# Altium PCB PCB1.PcbDoc
Units mil, origin at the board's own origin, x right, y up, seen from the top; angles counter-clockwise.
Board outline 1746.25 x 841.72 mil, 2 copper layers (Top Layer, Bottom Layer); 18 components, 14 nets, 60 pads, 0 vias.
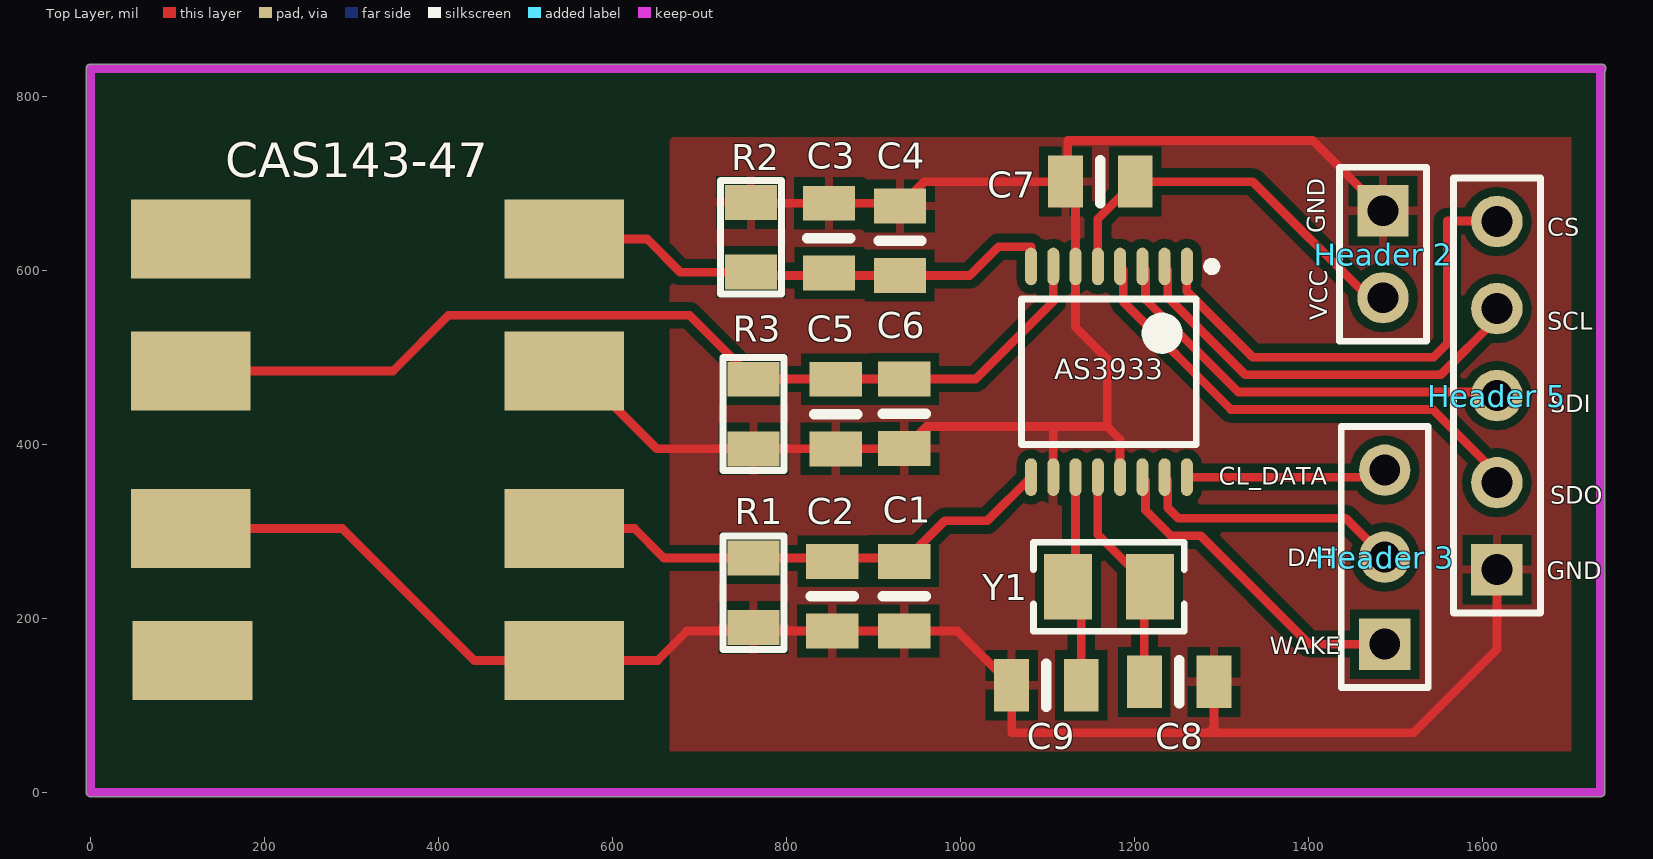
[diagram p0: Top Layer view]
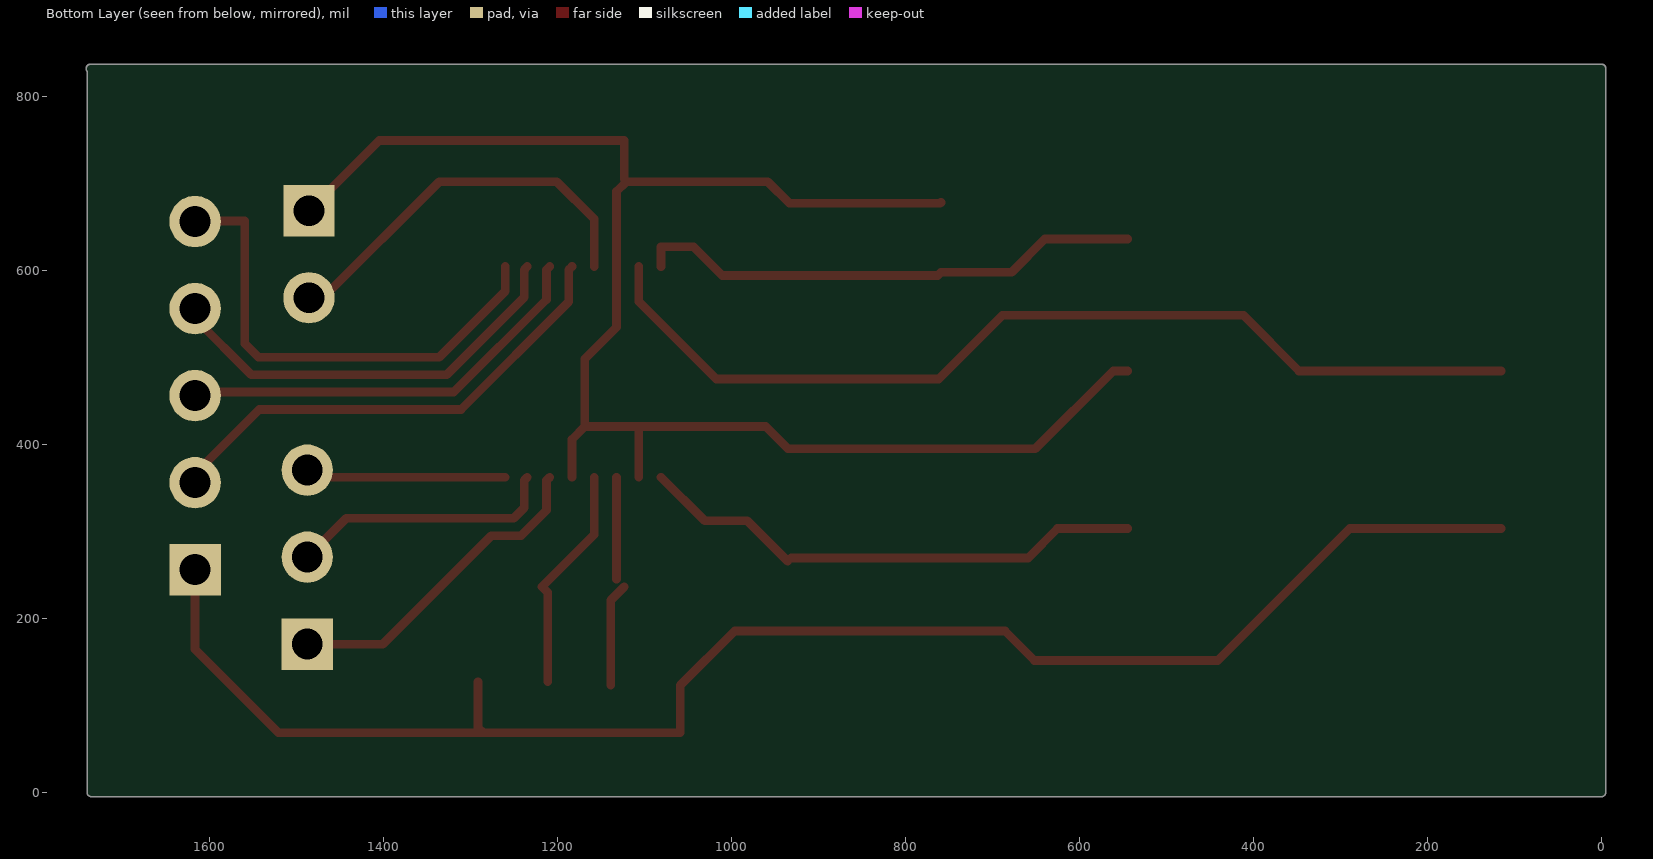
[diagram p1: Bottom Layer view, seen from below]
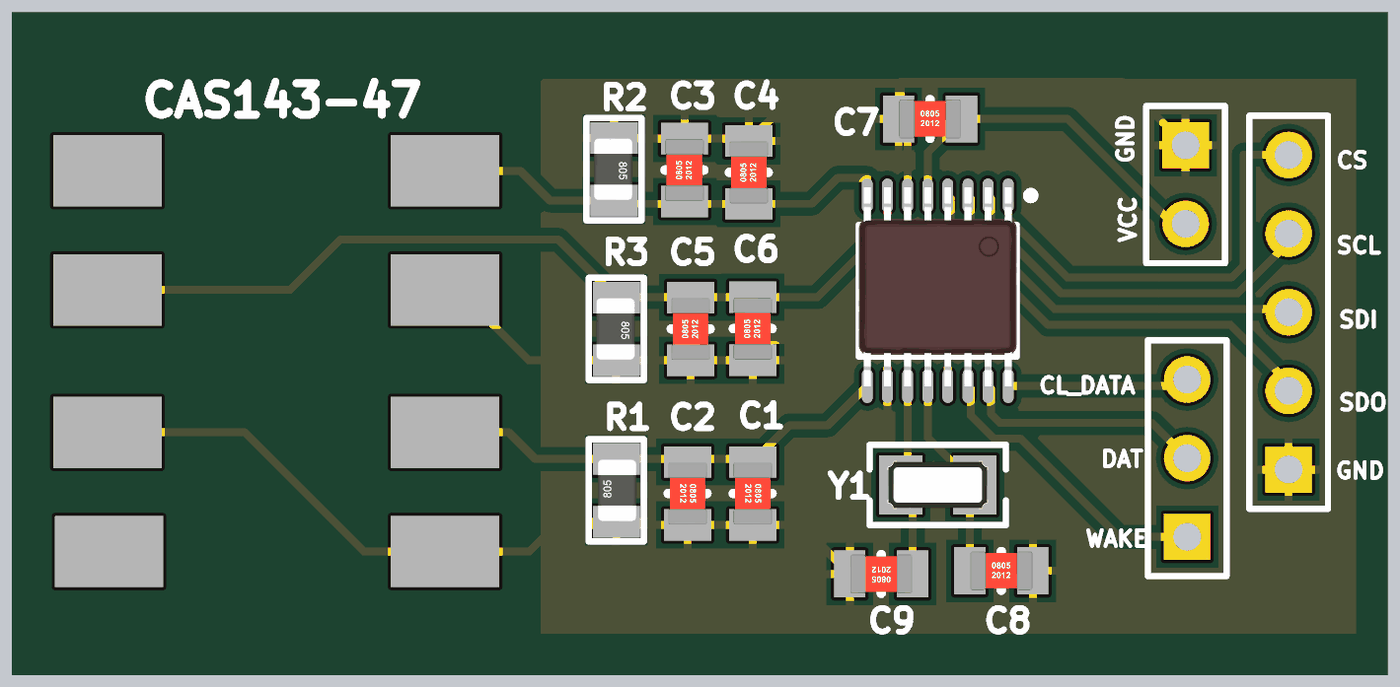
[diagram p2: 3D render of the assembled board from above, using the file's embedded part models]

## Layer stack, top to bottom
Top Solder: solder mask 0.4, Solder Resist, Dk 3.5
Top Layer: signal copper 1.4
Dielectric 1: dielectric 12.6, FR-4, Dk 4.8
Bottom Layer: signal copper 1.4
Bottom Solder: solder mask 0.4, Solder Resist, Dk 3.5

## Board outline
-5.01,0 ccw(c0,0) 0,-5.01 1735.24,-5.01 ccw(c1735.24,0) 1738.78,-3.55 ccw(c1735.24,0) 1740.25,0 1740.25,828.71 ccw(c1736.22,831.69) 1741.24,831.69 ccw(c1736.22,831.69) 1736.22,836.71 0,836.71 ccw(c0,831.69) -5.01,831.69

## Design rules (kind name [scope] priority, off if disabled: settings)
Clearance [All] p1: gap=10
PolygonConnect [All] p1: connectstyle=Relief reliefconductorwidth=10 reliefentries=4 polygonreliefangle="90 Angle" airgapwidth=10
RoutingVias [All] p1: holewidth=28 width=50 viastyle="Through Hole" minholewidth=28 minwidth=50 maxholewidth=28 maxwidth=50
SolderMaskExpansion [All] p1: expansion=4
Width [All] p1: maxlimit=10 minlimit=10 preferedwidth=10
30 further rules are at their usual default settings.

## Classes and differential pairs
component class Sheet1: 30 AS3933 C1 C2 C4 C6 C7 C8 C9 CAS143-47 "Header 2" "Header 3" "Header 5" R1 R2 R3 Y1

## Components (designator, comment, footprint, x,y, rotation, side; value= is the part's Value field where it differs from the comment)
AS3933 "" TSOP65P640X110-16N 1170.28,483.27 r270 top
C1 "15pF" SMD-0805C 935.04,225.39 r180 top
C2 "330pF" SMD-0805C 852.36,225.39 r180 top
C3 "15pF" SMD-0805C 848.43,636.81 r0 top
C4 "330pF" SMD-0805C 930.12,633.86 r0 top
C5 "4.7pF" SMD-0805C 856.3,434.68 r0 top
C6 "220pF" SMD-0805C 935.04,435.04 r0 top
C7 "0.1uF" SMD-0805C 1160.43,701.77 r270 top
C8 "22pF" SMD-0805C 1250.98,126.97 r270 top
C9 "22pF" SMD-0805C 1098.43,123.03 r90 top
CAS143-47 "CAS143-47" CAS143-47 329.72,393.7 r90 top
"Header 2" "Header 2" HDR1X2 1485.24,668.31 r270 top
"Header 3" "Header 3" HDR1X3 1487.2,170.28 r90 top
"Header 5" "Header 5" HDR1X5 1616.14,255.91 r90 top
R1 "196k" SMD-0805-RES 761.81,229.33 r0 top
R2 "210k" SMD-0805-RES 758.86,637.8 r180 top
R3 "287" SMD-0805-RES 761.81,434.68 r180 top
Y1 "32.768KHZ" "ABRACON ABS07" 1170.28,236.22 r0 top

## Footprints (in the part's own frame and the unit in brackets; to place one, negate y for a bottom-side part, rotate by r counter-clockwise, add the part's x,y. Pads: shape width x height; smd on the part's side, far side on the other; paste and mask are expansions set on the pad)
"ABRACON ABS07" [mm] "Crystal, 2-Leads, Body 3.20x1.50mm, IPC Medium Density"
  rect 1.4x1.9 smd: 1(-1.2,0) 2(1.2,0)
  silkscreen extent -2.2,-1.3 2.2,1.3, body extent -1.62,-0.77 1.63,0.78, height 0.9
CAS143-47 [mm]
  rect 2.3x3.5 smd: 1(-6.15,5.4) 2(-2.3,5.45) 3(2.3,5.45) 4(6.15,5.45) 5(-6.15,-5.45) 6(-2.3,-5.45) 7(2.3,-5.45) 8(6.15,-5.45)
  body extent -7.2,-7.1 7.2,7, height 4
HDR1X2 [mm] "Connector; Header; 2 Position"
  rect 1.5x1.5 hole 0.9: 1(0,0)
  round 1.5 hole 0.9: 2(2.54,0)
  silkscreen extent -1.27,-1.27 3.81,1.27
HDR1X3 [mm] "Connector; Header; 3 Position"
  rect 1.5x1.5 hole 0.9: 1(0,0)
  round 1.5 hole 0.9: 2(2.54,0) 3(5.08,0)
  silkscreen extent -1.27,-1.27 6.35,1.27
HDR1X5 [mm] "Connector; Header; 5 Position"
  rect 1.5x1.5 hole 0.9: 1(0,0)
  round 1.5 hole 0.9: 2(2.54,0) 3(5.08,0) 4(7.62,0) 5(10.16,0)
  silkscreen extent -1.27,-1.27 11.43,1.27
SMD-0805-RES [mil]
  rect 60x40 smd: 1(0,40) 2(0,-40)
  silkscreen extent -35,-65 35,65, body extent -24,-39 26,39, height 31
SMD-0805C [mil]
  rect 60x40 smd: 1(0,40) 2(0,-40)
  silkscreen extent -25,0 25,0, body extent -25,-39 25,39, height 35
TSOP65P640X110-16N [mm] "TSOP, 16-Leads, Body 5.00x4.40mm, Pitch 0.65mm, IPC Medium Density"
  oval 1.1x0.35 smd: 1(-3.075,2.275) 2(-3.075,1.625) 3(-3.075,0.975) 4(-3.075,0.325) 5(-3.075,-0.325) 6(-3.075,-0.975) 7(-3.075,-1.625) 8(-3.075,-2.275) 9(3.075,-2.275) 10(3.075,-1.625) 11(3.075,-0.975) 12(3.075,-0.325) 13(3.075,0.325) 14(3.075,0.975) 15(3.075,1.625) 16(3.075,2.275)
  silkscreen extent -3.2,-2.55 2.12,3.13, body extent -3.34,-2.55 3.09,2.55, height 1.11

## Part data
AS3933 CAS143-47: library part Component_1
C1 C3: library part CC0805FRNPO9BN150, "Cap Ceramic 15pF 50V C0G 1%  0805"
C2 C4: library part CC0805GRNPO9BN331, "Cap Ceramic 330pF 50V C0G 2%  0805"
C5: library part CL21C4R7BBANNNC, "Cap Ceramic 4.7pF 50V C0G 0.1pF  0805"
C6: library part GCM2165C2A221FA16D, "Cap Ceramic 220pF 100V C0G 1% 0805"
C7: library part CL21B104JBCNNNC, "CAP CER 0.1uF 50V X7T 0805"
C8 C9: library part CL21C220JBANNND, "Cap Ceramic 22pF 50V C0G 5%0805"
"Header 2": "Header, 2-Pin"
"Header 3": "Header, 3-Pin"
"Header 5": "Header, 5-Pin"
R1: library part ERJ-6ENF1963V, "RES SMD 196K OHM 1% 1/8W 0805"
R2: library part ERJ-6ENF2103V, "RES SMD 210K OHM 1% 1/8W 0805"
R3: library part ERJ-6ENF2870V, "RES SMD 287 OHM 1% 1/8W 0805"
Y1: library part "Abracon Crystal ABS07", "SMT Crystal"

## Nets (pads, with @x,y where several pads share a name; then routed paths per layer and width w, separated by ;. In a path a pad name is that pad's centre, name@x,y a point inside that pad or via, vN(x,y) a via of type N, cw(c..) or ccw(c..) an arc to the next point about the centre after c; other vN are vias at no path point)
CL_DAT: "Header 3.3" AS3933.16 | length 230.7
  Top Layer w10: AS3933.16 1479.13,362.2 1487.2,370.28
CS: "Header 5.5" AS3933.1 | length 563.8
  Top Layer w10: AS3933.1 1259.84,575.79 1335.63,500 1543.31,500 1559.06,515.75 1559.06,656.5 1615.55,656.5 1616.14,655.91
DAT: "Header 3.2" AS3933.15 | length 309.5
  Top Layer w10: AS3933.15 1237.95,358.5 1237.95,326.93 1249.92,314.96 1442.52,314.96 1487.2,270.28
GND: "Header 2.1" "Header 5.1" AS3933.6 AS3933.10 AS3933.13 C1.1 C2.1 C3.1 C4.1 C5.2 C6.2 C7.2 C8.1 C9.1 CAS143-47.2 CAS143-47.5 CAS143-47.7 R1.2 R2.2 R3.1 | length 3763
  Top Layer w10: CAS143-47.2 289.37,303.15 440.94,151.57 CAS143-47.5 651.57,151.57 685.39,185.39 C2.1 C1.1 996.06,185.39 C9.1 1058.43,68.54 1285.08,68.54 ; CAS143-47.7 561.02,484.25 650.59,394.68 R3.1 C5.2 934.69,394.68 C6.2 960.28,420.28 1103.35,420.28 ; R2.2 759.84,676.81 C3.1 933.07,676.81 958.03,701.77 C7.2 ; AS3933.10 1106.3,417.32 1103.35,420.28 ; AS3933.13 1183.07,405.51 1168.31,420.28 ; C8.1 1290.98,74.45 1285.08,68.54 ; 1485.24,668.31 1404.53,749.02 1123.03,749.02 1123.03,704.37 C7.2 ; 1616.14,255.91 1616.14,164.37 1520.32,68.54 1285.08,68.54 ; 1103.35,420.28 1168.31,420.28 ; C7.2 1131.89,690.32 AS3933.6 1131.89,534.45 1168.31,498.03 1168.31,420.28
LF1P: AS3933.9 C1.2 C2.2 CAS143-47.6 R1.1 | length 586.6
  Top Layer w10: CAS143-47.6 625,303.15 658.82,269.33 R1.1 C1.2@931.1,269.33 ; C1.2 981.65,312.01 1030.51,312.01 AS3933.9
LF2P: AS3933.8 C3.2 C4.2 CAS143-47.8 R2.1 | length 590.2
  Top Layer w10: CAS143-47.8 639.76,635.83 677.8,597.8 R2.1 762.8,593.86 C4.2 1010.2,593.86 1043.31,626.97 1080.71,626.97 AS3933.8
LF3P: AS3933.7 C5.1 C6.1 CAS143-47.3 R3.2 | length 1125.4
  Top Layer w10: CAS143-47.3 347.44,484.25 411.42,548.23 688.27,548.23 R3.2 762.17,475.04 C6.1 1017.36,475.04 1106.3,563.98 AS3933.7
NetAS3933_11: AS3933.11 C9.2 Y1.1 | length 236.7
  Top Layer w10: Y1.1 1138.43,220.83 C9.2 ; Y1.1@1131.89,245.08 AS3933.11
NetAS3933_12: AS3933.12 C8.2 Y1.2 | length 262.8
  Top Layer w10: AS3933.12 1157.48,296.26 Y1.2 1210.98,229.68 C8.2
SCL: "Header 5.4" AS3933.2 | length 490
  Top Layer w10: AS3933.2 1237.95,600.63 1237.95,569.05 1327,480 1551.59,480 1616.14,544.55 1616.14,555.91
SDI: "Header 5.3" AS3933.3 | length 489
  Top Layer w10: AS3933.3 1212.36,600.63 1212.36,566.36 1318.72,460 1612.05,460 1616.14,455.91
SDO: "Header 5.2" AS3933.4 | length 563.6
  Top Layer w10: AS3933.4 1186.77,600.63 1186.77,563.66 1310.44,440 1542.28,440 1616.14,366.14 1616.14,355.91
VCC: "Header 2.2" AS3933.5 C7.1 | length 455.3
  Top Layer w10: AS3933.5 1157.48,658.82 C7.1 1335.63,701.77 1469.09,568.31 1485.24,568.31
WAKE: "Header 3.1" AS3933.14 | length 378.1
  Top Layer w10: AS3933.14 1212.36,358.5 1212.36,324.23 1241.63,294.96 1275.91,294.96 1400.59,170.28 1487.2,170.28
pads on no net: CAS143-47.1 CAS143-47.4

## Polygon pours and split planes (outlines as drawn)
GND on Top Layer "Top Layer-No Net" (solid, pour order 2): 663.39,752.95 1701.77,752.95 1701.77,47.24 665.35,47.24 665.35,749.02 663.39,750.98

## Keep-outs
Top Layer:
  lines w10: 1735.24,0 0,0 0,831.69 1736.22,831.69 1735.24,830.71 1735.24,0 ; 1735.24,0 1735.24,0

## Silkscreen, mask and mechanical layers (free items; w line width, h text height)
Top Overlay:
  text "GND" at 1418.31,642.72 h20 r90
  text "CS" at 1674.21,639.76 h20
  text "VCC" at 1421.26,542.32 h20 r90
  text "SCL" at 1674.21,531.5 h20
  text "SDI" at 1677.17,437.01 h20
  text "CL_DATA" at 1296.26,353.35 h20
  text "SDO" at 1677.17,331.69 h20
  text "DAT" at 1375,259.84 h20
  text "GND" at 1673.23,245.08 h20
  text "WAKE" at 1355.32,158.46 h20